# EAGLE board ISCTrainingProgramw2016_8 (EAGLE 7.5.0)
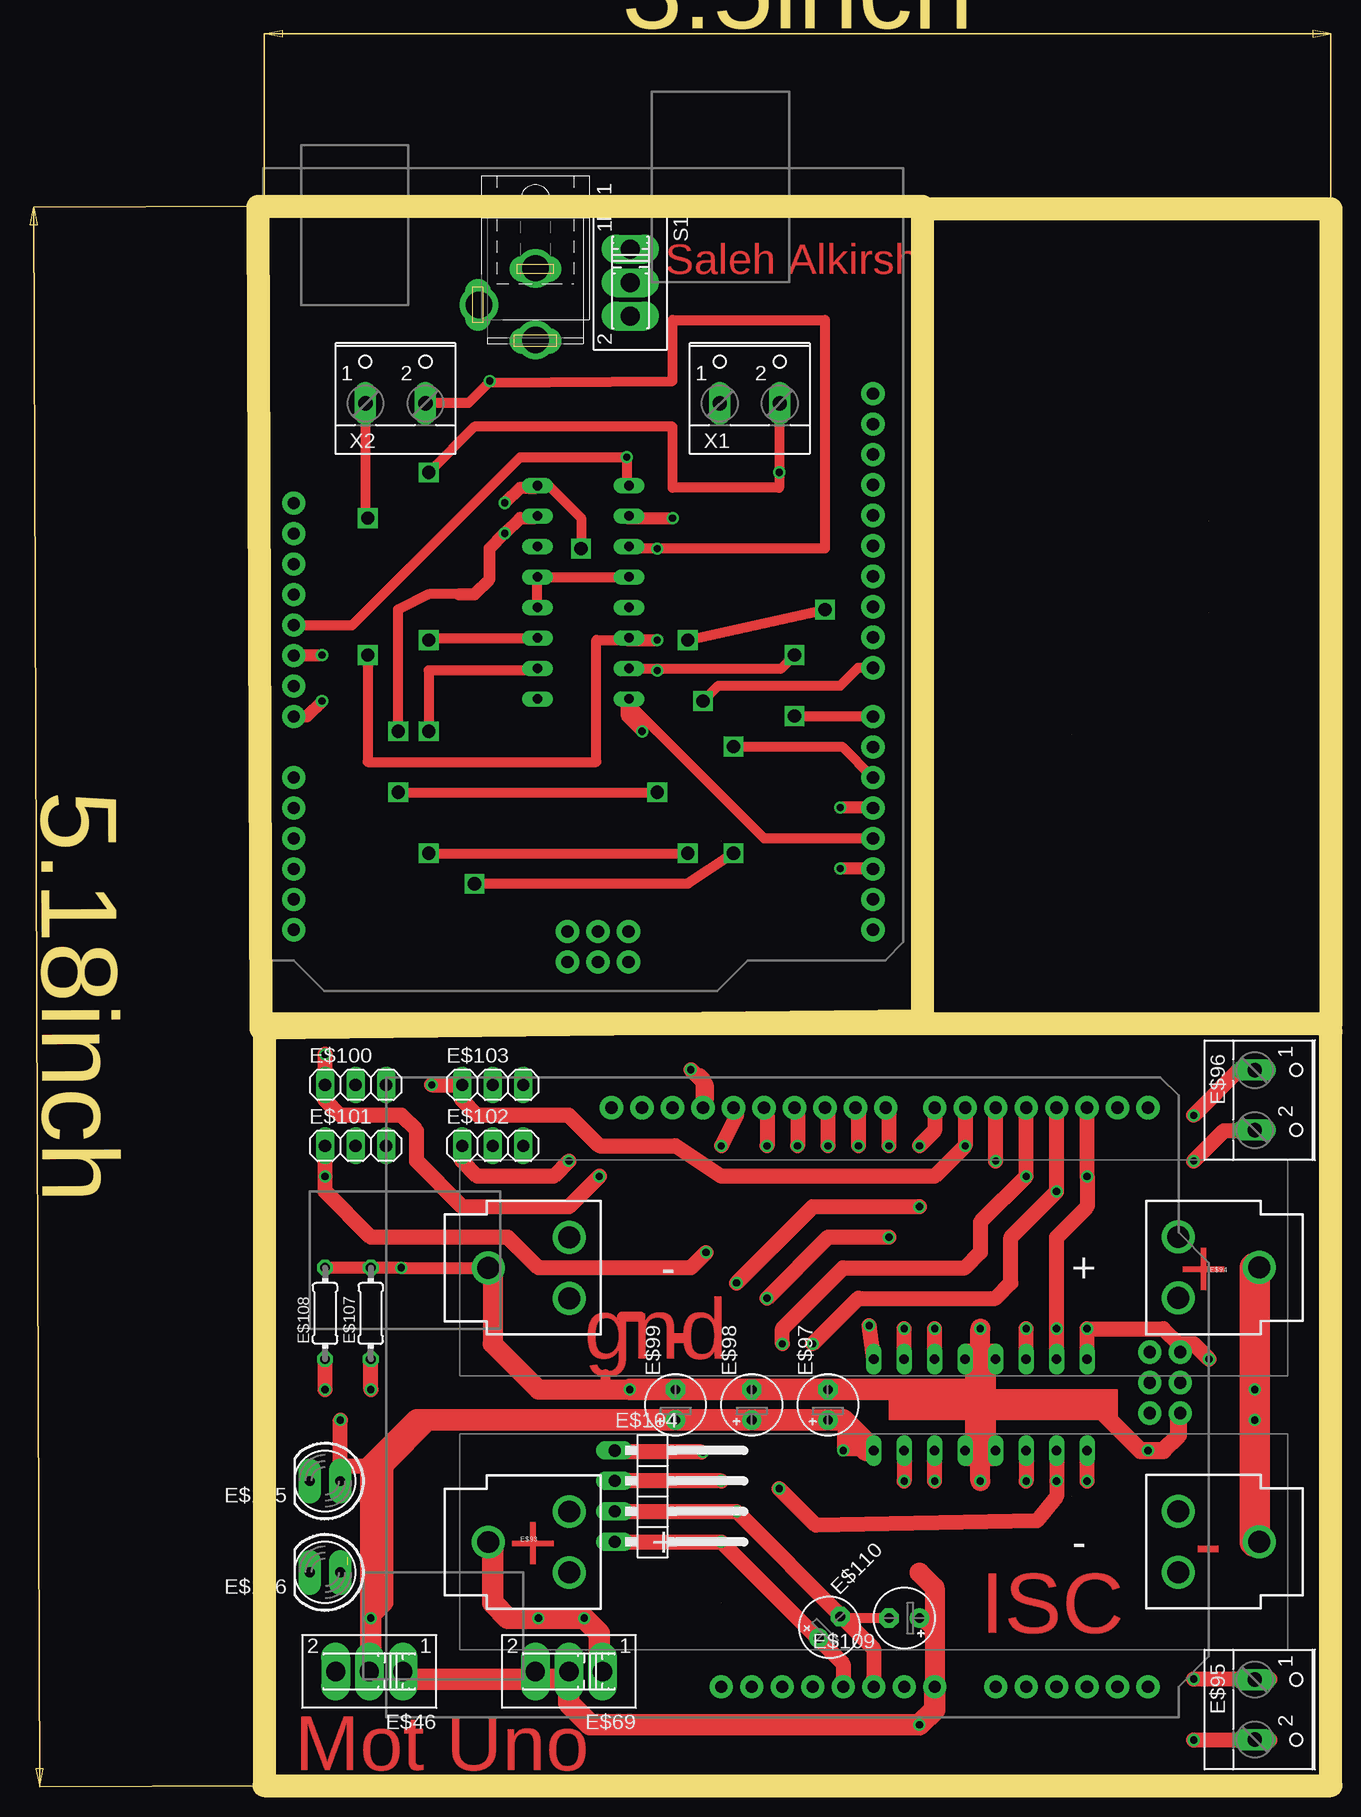
[diagram p0: board, top side]
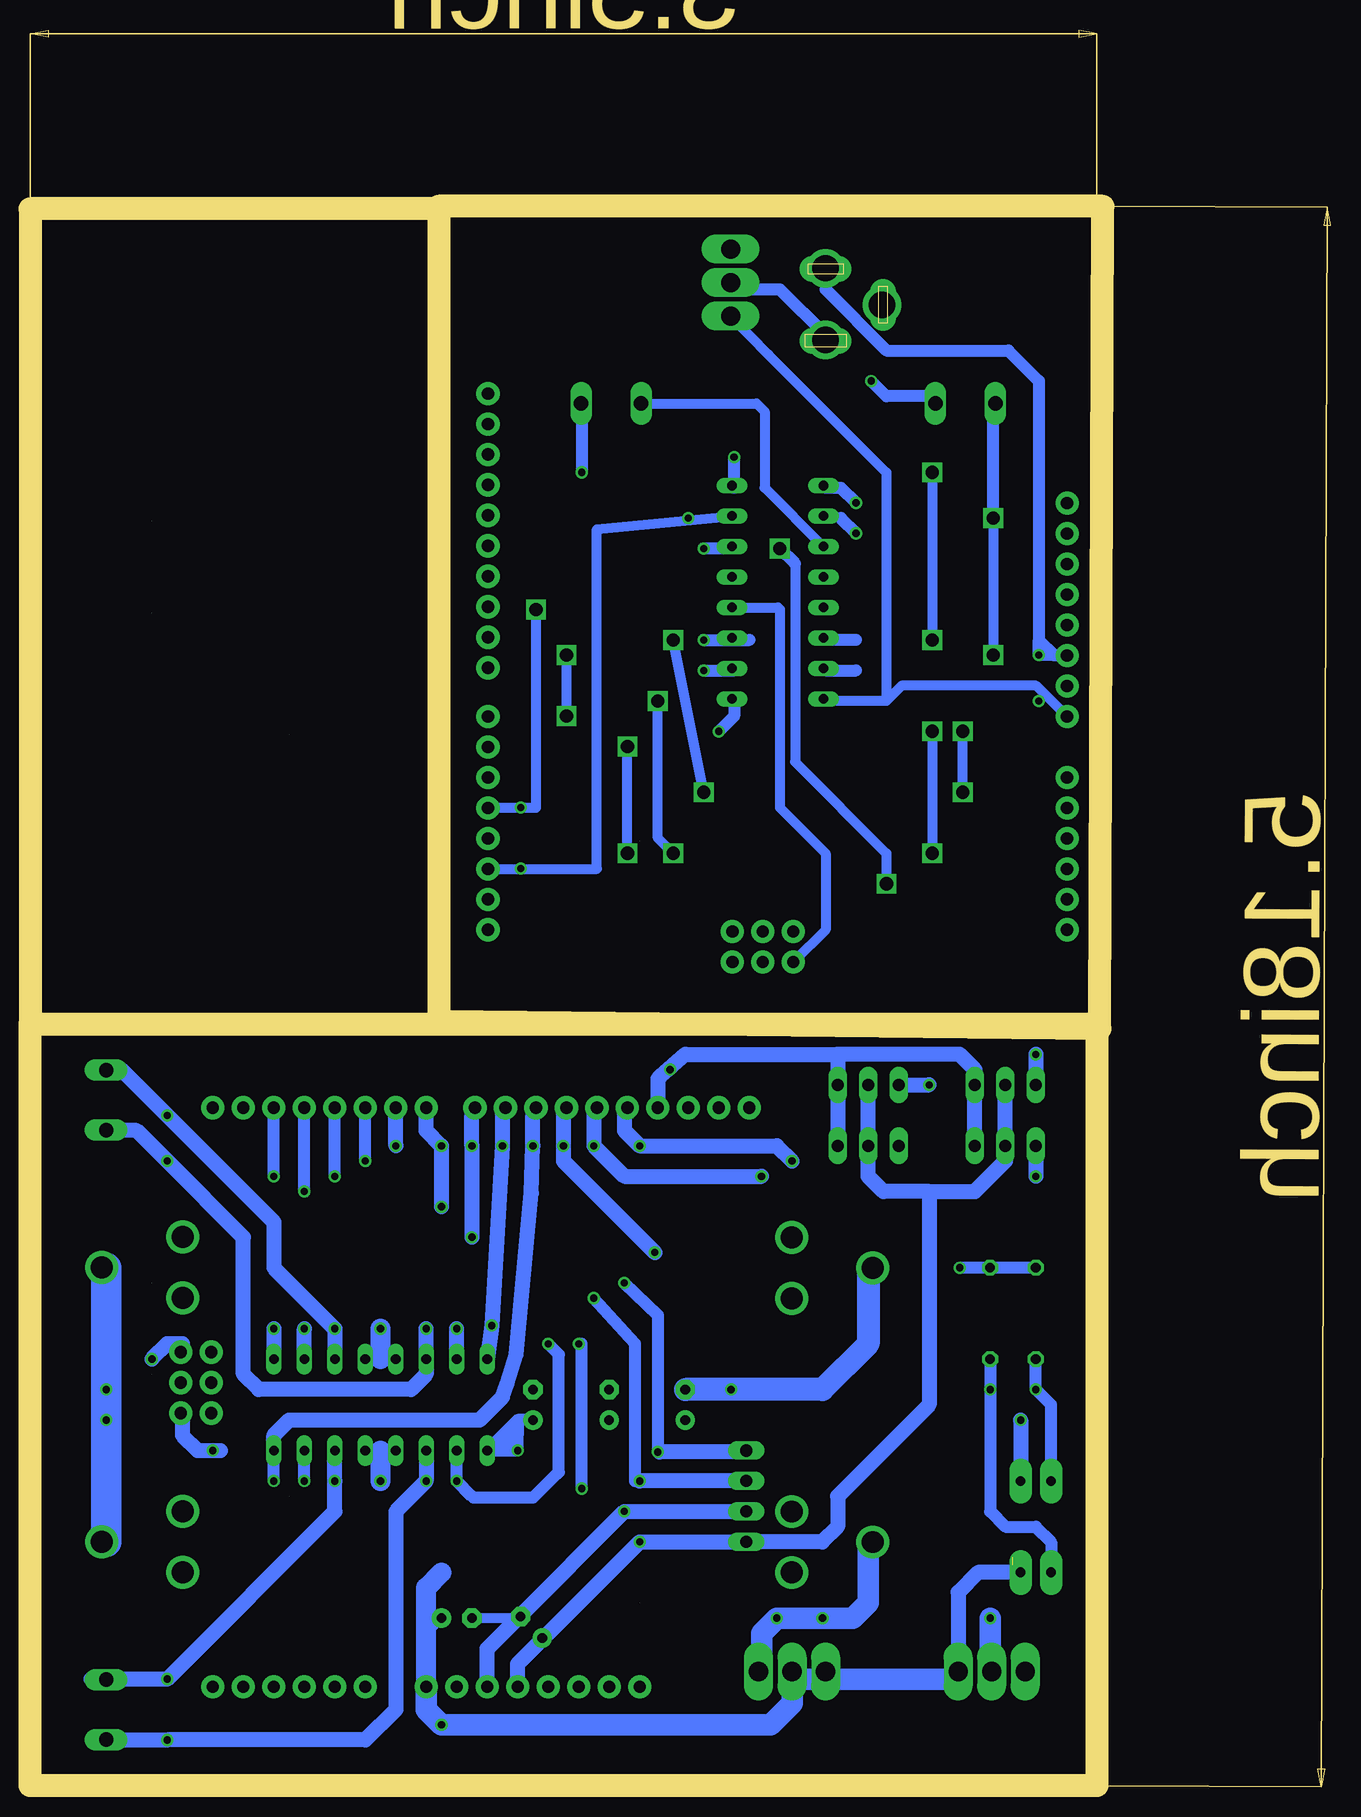
[diagram p1: board, bottom side, seen from below]

Size 89.41 x 131.66 mm. Coordinates in mm from the lower left corner, seen from the top.
Outline: 89.41,63.5 0.51,63.5 0.51,0 89.41,0 89.41,62.87 89.41,63.5
Outline: 55.12,131.44 89.41,131.44 89.41,63.5
Outline: 0.25,63.12 0,131.66 55.36,131.66 55.36,63.75 0.25,63.12
Copper layers (1*16): Top 0.035mm / dielectric 1.5mm / Bottom 0.035mm
Design rules "default": minimum track width 10mil, minimum drill 0.6mm, track to track 8mil, track to pad 8mil, pad to pad 8mil, via to via 8mil, smd to smd 8mil, copper to edge 40mil, drill to drill 8mil, minimum pad ring 10mil, minimum via ring 8mil, stop-mask expansion 4mil, vias tented up to drill 0mil, thermal gap 10mil

## Footprints (pad centres in the part's own frame; a part is rotated, then mirrored left to right if it is on the bottom)
5.5-2.5-BARRELCONNECTOR = drill 0.8 pad 2.184 long: 1 -3,0; 2 0,-4.8 | drill 1 pad 2.184 long: 3 3,0 | drill 2.2: P$1 -3.048,0; P$2 2.921,0; P$3 0,-4.699
ARDUINO_R3 = drill 1.016 pad 1.93: 3.3V 35.56,2.54; 5V 38.1,2.54; A0 50.8,2.54; A1 53.34,2.54; A2 55.88,2.54; A3 58.42,2.54; A4 60.96,2.54; A5 63.5,2.54; AREF 23.876,50.8; D0 63.5,50.8; D1 60.96,50.8; D2 58.42,50.8; D3 55.88,50.8; D4 53.34,50.8; D5 50.8,50.8; D6 48.26,50.8; D7 45.72,50.8; D8 41.656,50.8; D9 39.116,50.8; D10 36.576,50.8; D11 34.036,50.8; D12 31.496,50.8; D13 28.956,50.8; GND@1 40.64,2.54; GND@2 43.18,2.54; GND@3 26.416,50.8; GND@4 66.18,25.35; IOREF 30.48,2.54; MISO 63.64,30.43; MOSI 66.18,27.89; NC 27.94,2.54; RESET@1 33.02,2.54; RESET@2 63.64,25.35; SCK 63.64,27.89; SCL 18.796,50.8; SDA 21.336,50.8; VCC 66.18,30.43; VIN 45.72,2.54
SLIDE_SWITCH = drill 1.6 long: 1 -2.794,0; 2 0,0; 3 2.794,0
DIP16 = drill 0.8 long: P1 -8.89,-3.81; P2 -6.35,-3.81; P3 -3.81,-3.81; P4 -1.27,-3.81; P5 1.27,-3.81; P6 3.81,-3.81; P7 6.35,-3.81; P8 8.89,-3.81; P9 8.89,3.81; P10 6.35,3.81; P11 3.81,3.81; P12 1.27,3.81; P13 -1.27,3.81; P14 -3.81,3.81; P15 -6.35,3.81; P16 -8.89,3.81
BATTERY_18650-HOLDER = drill 1.829: GND@1 32.128,0.01; GND@2 25.38,2.55; GND@3 25.38,-2.53; PWR@1 -32.128,-0.01; PWR@2 -25.38,2.53; PWR@3 -25.38,-2.55
2PIN-SCREW-TERMINAL = drill 1.194 long: 1 -2.5,-1.27; 2 2.5,-1.27
E2,5-5 = drill 0.813 pad 1.6: + -1.27,0 | drill 0.813 pad 1.6 octagon: - 1.27,0
1X03 = drill 1.016 long: 1 -2.54,0; 2 0,0; 3 2.54,0
1X04/90 = drill 1.016 long: 1 -3.81,-3.81; 2 -1.27,-3.81; 3 1.27,-3.81; 4 3.81,-3.81
LED5MM = drill 0.813 pad 1.88 long: A -1.27,0; K 1.27,0
0204/7 = drill 0.813 octagon: 1 -3.81,0; 2 3.81,0

## Placement (x,y rotation side)
E$1  [5.5-2.5-BARRELCONNECTOR]  23.11,123.44 270 top
E$23  [ARDUINO_R3]  10.67,5.71 0 top
E$46  [SLIDE_SWITCH]  9.27,9.53 180 top
E$69  [SLIDE_SWITCH]  25.91,9.53 180 top
E$92  [DIP16]  60.2,31.75 0 bottom
E$93  [BATTERY_18650-HOLDER]  51.31,20.32 0 top
E$94  [BATTERY_18650-HOLDER]  51.31,43.18 180 top
E$95  [2PIN-SCREW-TERMINAL]  84.33,6.35 270 top
E$96  [2PIN-SCREW-TERMINAL]  84.33,57.15 270 top
E$97  [E2,5-5]  47.5,31.75 90 top
E$98  [E2,5-5]  41.15,31.75 90 top
E$99  [E2,5-5]  34.8,31.75 90 top
E$100  [1X03]  8.13,58.42 0 top
E$101  [1X03]  8.13,53.34 0 top
E$102  [1X03]  19.56,53.34 0 top
E$103  [1X03]  19.56,58.42 0 top
E$104  [1X04/90]  33.53,24.13 270 top
E$105  [LED5MM]  5.59,25.4 180 top
E$106  [LED5MM]  5.59,17.78 180 top
E$107  [0204/7]  9.4,39.37 90 top
E$108  [0204/7]  5.59,39.37 90 top
E$109  [E2,5-5]  53.85,13.97 180 top
E$110  [E2,5-5]  47.62,13.21 45 top
J1  ARDUINO_UNO_R3  [ARDUINO_R3]  0.44,134.84 270 top
S1  [SLIDE_SWITCH]  31.02,125.29 270 top
U$1  MOTOR_DRIVERDIP16  [DIP16]  27.09,99.48 270 top
X1  [2PIN-SCREW-TERMINAL]  40.98,116.49 0 top
X2  [2PIN-SCREW-TERMINAL]  11.45,116.49 0 top

## Library data of the parts
E$1 E$23 E$46 E$69 E$92-E$110 J1 S1 U$1 = ISCTRainingProgram
X1 X2 = ISCTRainingProgram; MPN: 237-102; OC_FARNELL: unknown; OC_NEWARK: 70K9898

## Nets
GND: U$1.P4 U$1.P5 U$1.P13
N$1: U$1.P3 X1.1
N$2: U$1.P6 X1.2
N$3: X2.2
N$4: U$1.P11 X2.1
N$5: J1.5V U$1.P16
N$6: J1.GND@4 U$1.P12
N$7: J1.VIN S1.3 U$1.P8
N$8: J1.D3 U$1.P9
N$9: J1.D2 U$1.P15
N$10: J1.D4
N$11: J1.D5 U$1.P1
N$12: J1.D7 U$1.P10
N$13: J1.D8 U$1.P7
S$60: E$92.P8 E$97.+
S$61: E$92.P6
S$209: E$92.P3
S$210: E$92.P11
S$211: E$92.P14
S$214: E$92.P9
S$215: E$92.P1
S$216: E$92.P2
S$217: E$92.P16
S$218: E$92.P15
S$219: E$92.P10
S$226: E$100.2 E$103.2 E$104.4
S$227: E$101.3 E$102.3
S$228: E$23.GND@3
S$229: E$103.1
S$231: E$101.1
S$232: E$100.1
S$233: E$102.1
S$234: E$99.-
S$239: E$104.3 E$109.-
S$245: E$108.2
S$246: E$108.1
S$247: E$106.K E$107.1
S$248: E$106.A
S$251: E$109.+
S$253: E$92.P7

## Tracks (layer width: path | path; a pad name or v marks a point on that pad's centre or on a via)
GND
  Top 0.813: U$1.P5 U$1.P4 U$1.P13
N$1
  Bottom 0.813: X1.1 28.86,115.22 28.19,114.55 28.19,108.2 U$1.P3
N$2  (via drill 0.6, 1.1)
  Top 0.813: v14.22,95.5 14.39,95.67 U$1.P6 | X1.2 43.43,115.17 v43.43,109.47 43.43,108.2 34.54,108.2 34.54,113.28 18.03,113.28 v14.22,109.47
  Bottom 0.813: v14.22,109.47 v14.22,95.5
  Bottom 1.016: 43.43,114.55 v43.43,109.47
N$4  (via drill 0.6, 1.1)
  Top 0.813: X2.1 8.95,105.85 v9.14,105.66 | v9.14,94.23 9.14,85.34 28.19,85.34 28.19,95.5 30.73,95.5 U$1.P11
  Top 1.016: 30.73,95.5 v33.27,95.5
  Bottom 0.813: v9.14,105.66 v9.14,94.23
  Bottom 1.016: v9.14,105.66 9.14,115.82 | v33.27,95.5 29.46,95.5
N$5  (via drill 0.6)
  Top 0.813: J1.5V 7.84,96.74 21.84,110.74 v30.73,110.74 30.73,108.54 U$1.P16
  Bottom 1.016: 30.73,108.2 v30.73,110.74
N$6
  Bottom 0.813: U$1.P12 27.09,98.21 26.92,98.04 26.92,81.53 23.11,77.72 23.11,71.34 J1.GND@4
N$7
  Bottom 0.813: 18.03,90.42 23.11,90.42 U$1.P8 | S1.3 27.87,119.31 18.03,109.47 18.03,90.42 | J1.VIN 5.55,91.69 16.76,91.69 18.03,90.42
N$8
  Top 0.813: U$1.P9 30.9,90.25 42.16,78.99 51.21,78.99 J1.D3
N$9
  Bottom 0.813: J1.D2 42.19,76.42 42.16,76.45 42.16,104.73 U$1.P15
N$10  (via drill 0.6, 1.1)
  Top 0.813: 16.76,99.31 14.22,99.31 11.68,98.04 v11.68,87.88 | v11.68,82.8 v33.27,82.8 | v35.81,95.5 v47.24,98.04
  Top 1.016: 16.76,99.31 18.03,99.31 19.3,100.58 19.3,103.12 v20.57,104.39 21.84,105.66 23.11,105.66
  Bottom 0.813: v33.27,82.8 v35.81,95.5 | v47.24,98.04 47.24,81.53 47.27,81.5 J1.D4 | v11.68,82.8 v11.68,87.88
  Bottom 1.016: 21.84,105.66 v20.57,104.39
N$11  (via drill 1.1)
  Top 0.813: U$1.P1 24.21,108.37 26.92,105.66 v26.92,103.12 | v18.03,75.18 35.81,75.18 v39.62,77.72 | v39.62,86.61 48.67,86.61 J1.D5
  Bottom 0.813: 25.65,101.85 25.65,85.34 18.03,77.72 v18.03,75.18 | v39.62,77.72 v39.62,86.61
  Bottom 1.016: 25.65,101.85 v26.92,103.12
N$12  (via drill 1.1)
  Top 0.813: U$1.P10 43.6,93.13 v44.7,94.23 | v44.7,89.15 51.21,89.15 J1.D7
  Bottom 0.813: v44.7,94.23 v44.7,89.15
N$13  (via drill 1.1)
  Top 0.813: U$1.P7 23.11,92.96 14.22,92.96 v14.22,87.88 | v14.22,77.72 v35.81,77.72 | v37.08,90.42 38.35,91.69 48.51,91.69 50.01,93.19 J1.D8
  Bottom 0.813: v14.22,87.88 v14.22,77.72 | v35.81,77.72 37.08,78.99 v37.08,90.42
S$2  (via drill 0.6)
  Top 0.813: 14.16,115.27 17.54,115.27 19.24,116.97 34.54,117.09 34.54,122.17 47.24,122.17 47.24,103.12 v33.27,103.12 30.73,103.12
  Bottom 1.016: 30.73,103.12 v33.27,103.12
S$4
  Bottom 1.016: 23.11,120.9 26.92,124.71 29.46,124.71
S$12  (via drill 0.6)
  Top 1.016: 2.79,94.23 v5.33,94.23
  Bottom 1.016: 23.11,127.25 23.11,124.71 18.03,119.63 7.87,119.63 5.33,117.09 5.33,95.5 | 5.33,95.5 4.06,94.23 | 4.06,94.23 2.79,94.23 | 4.06,94.23 v5.33,94.23 5.33,95.5
S$13  (via drill 0.6)
  Top 1.016: 2.79,89.15 4.06,89.15 v5.33,90.42
S$14  (via drill 0.6)
  Top 1.016: 51.05,81.53 v48.51,81.53
S$15  (via drill 0.6)
  Top 1.016: 51.05,76.45 v48.51,76.45
S$16  (via drill 0.6)
  Bottom 1.016: 14.22,115.82 18.03,115.82 v19.3,117.09
S$17
  Bottom 1.016: 23.11,92.96 20.57,92.96
S$18
  Bottom 1.016: 20.57,95.5 23.11,95.5
S$19  (via drill 0.6)
  Top 1.016: v20.57,106.93 21.84,108.2 23.11,108.2
  Bottom 1.016: 23.11,108.2 21.84,108.2 v20.57,106.93
S$20  (via drill 0.6)
  Top 1.016: 30.73,105.66 v34.54,105.66
S$21  (via drill 0.6)
  Top 1.016: v32,87.88 30.73,89.15 30.73,90.42
  Bottom 1.016: 30.73,90.42 30.73,89.15 v32,87.88
S$22  (via drill 0.6)
  Bottom 1.016: v33.27,92.96 30.73,92.96
S$34  (1 unrouted)
S$60  (via drill 0.6)
  Top 1.016: 48.77,29.21 v48.77,27.94 50.04,27.94 48.77,29.21 | 48.77,30.48 48.77,29.21
  Top 1.27: 9.4,26.67 6.86,26.67 v6.86,30.48 | v9.4,13.97 10.67,15.24 10.67,26.67 14.48,30.48
  Top 1.778: 9.4,10.16 v9.4,13.97 9.4,26.67 13.21,30.48 14.48,30.48 E$97.+ 48.77,30.48 50.67,28.57 50.67,27.94
  Bottom 1.016: E$97.+ 48.77,30.48 | 48.77,30.48 E$92.P8 50.04,27.94 | 50.04,27.94 v48.77,27.94 48.77,29.21 | 48.77,30.48 48.77,29.21 | 48.77,29.21 50.04,27.94
  Bottom 1.27: v6.86,30.48 6.86,26.67
  Bottom 1.778: 9.4,10.16 v9.4,13.97
S$61  (via drill 0.6)
  Top 1.27: v56.39,25.4 E$92.P6 | v77.98,3.81 84.33,3.81
  Bottom 1.27: 83.06,3.81 v77.98,3.81 61.47,3.81 58.93,6.35 58.93,22.86 v56.39,25.4 E$92.P6
S$209  (via drill 0.6)
  Top 1.27: 84.33,8.89 v77.98,8.89 | E$92.P3 v64.01,25.4
  Bottom 1.27: 84.33,8.89 v77.98,8.89 64.01,22.86 v64.01,25.4 E$92.P3
S$210  (via drill 0.6)
  Top 1.27: E$92.P11 v56.39,38.1 | v77.98,52.07 80.52,54.61 83.06,54.61
  Bottom 1.27: 83.06,54.61 80.52,54.61 v77.98,52.07 71.63,45.72 71.63,34.29 70.36,33.02 57.66,33.02 56.39,34.29 E$92.P11 v56.39,38.1
S$211  (via drill 0.6)
  Top 1.27: E$92.P14 v64.01,38.1 | v77.98,55.88 81.79,59.69 83.06,59.69
  Bottom 1.27: 83.06,59.69 81.79,59.69 v77.98,55.88 69.09,46.99 69.09,43.18 v64.01,38.1 E$92.P14
S$212  (via drill 0.6)
  Top 1.27: 70.36,31.75 70.36,31.11
  Top 1.422: 70.36,31.11 73.53,27.94 v74.17,27.94 75.44,27.94 76.71,29.21 76.71,31.11
S$213
  Bottom 1.27: 76.71,30.48 76.71,29.21 75.44,27.94 73.53,27.94
S$214  (via drill 0.6)
  Top 1.27: E$92.P9 v50.93,38.35 | 50.04,55.88 v50.04,53.34
  Bottom 1.27: 50.04,55.88 v50.04,53.34 v50.93,38.35 E$92.P9
S$215  (via drill 0.6)
  Top 1.27: 47.5,55.88 v47.5,53.34 | v69.09,25.4 E$92.P1
  Bottom 1.016: v69.09,25.4 E$92.P1
  Bottom 1.27: E$92.P1 69.09,29.21 67.82,30.48 51.94,30.48 50.04,32.38 49.66,33.53 48.9,35.94 47.62,49.4 v47.5,53.34 47.5,55.88
S$216  (via drill 0.6)
  Top 1.27: E$92.P2 66.55,24.13 64.9,22.1 46.48,21.72 43.43,24.77
  Bottom 1.016: v66.55,25.4 E$92.P2
S$217  (via drill 0.6)
  Top 1.27: v79.25,35.56 77.98,36.83 76.71,36.83 75.44,38.1 v69.09,38.1 E$92.P16
  Bottom 1.27: 76.71,36.83 77.98,36.83 v79.25,35.56 | v69.09,38.1 E$92.P16
S$218  (via drill 0.6)
  Top 1.27: E$92.P15 66.55,45.72 69.09,48.26 v69.09,50.8 69.09,55.88
  Bottom 1.016: v69.09,50.8 69.09,55.88
  Bottom 1.27: E$92.P15 v66.55,38.1
S$219  (via drill 0.6)
  Top 1.27: E$92.P10 v53.85,38.1
  Bottom 1.27: E$92.P10 v53.85,38.1
S$220
  Bottom 1.016: 43.43,24.77 43.43,35.05
S$221  (via drill 0.6)
  Top 1.27: v46.23,36.83 50.04,40.64 61.47,40.64 62.74,41.91 62.74,45.72 v66.55,49.53 66.55,55.88
  Bottom 1.016: v46.23,36.83 45.34,35.94 45.34,26.16 | v66.55,49.53 66.55,55.88
S$222  (via drill 0.6)
  other vias: 43.43,24.77
S$223  (via drill 0.6)
  Top 1.27: v43.69,36.83 43.69,38.1 48.77,43.18 58.93,43.18 60.2,44.45 60.2,46.99 v64.01,50.8 64.01,55.88
  Bottom 1.016: v64.01,50.8 64.01,55.88
S$224  (via drill 0.6)
  Top 1.27: v61.47,52.07 61.47,55.88
  Bottom 1.016: v61.47,52.07 61.47,55.88
S$225
  Bottom 1.016: 43.43,35.18 43.43,36.83
S$226  (via drill 0.6)
  Top 1.27: E$104.4 v38.61,20.32 48.77,10.16 48.77,8.89
  Bottom 1.27: 14.48,49.53 10.67,49.53 8.13,52.07 E$100.2 | 14.48,49.53 14.48,31.75 22.1,24.13 22.1,21.59 23.37,20.32 E$104.4 v38.61,20.32 48.77,10.16 48.77,8.89 | 14.48,49.53 18.29,49.53 19.56,50.8 E$103.2
S$227
  Bottom 1.27: E$101.3 10.67,59.69 11.94,60.96 22.1,60.96 | 22.1,60.96 34.8,60.96 36.83,59.18 37.08,58.93 37.08,56.39 | 22.1,60.96 E$102.3
S$228
  Top 1.27: 36.83,59.18 37.08,58.93 E$23.GND@3
S$229  (via drill 0.6)
  Top 1.27: v58.93,53.34 56.39,50.8 38.61,50.8 34.8,53.34 28.45,53.34 25.91,55.88 18.29,55.88 17.02,57.15 E$103.1 v14.48,58.42
  Bottom 1.27: v58.93,53.34 58.93,55.88 | E$103.1 v14.48,58.42
S$230
  Top 1.27: 58.93,55.88 58.93,53.34
S$231  (via drill 0.6)
  Top 1.27: v37.34,44.45 36.07,43.18 23.37,43.18 20.83,45.72 9.4,45.72 5.59,49.53 v5.59,50.8 E$101.1 | 44.96,55.88 v44.96,53.34
  Bottom 1.27: 44.96,55.88 v44.96,53.34 44.96,52.07 v37.34,44.45 | E$101.1 v5.59,50.8
S$232  (via drill 0.6)
  Top 1.27: v28.45,50.8 25.91,48.26 17.02,48.26 13.21,52.07 13.21,54.61 11.94,55.88 6.86,55.88 5.59,57.15 v5.59,60.96 | 42.42,55.88 v42.42,53.34
  Bottom 1.27: 42.42,55.88 v42.42,53.34 39.88,50.8 v28.45,50.8 | v5.59,60.96 E$100.1
S$233  (via drill 0.6)
  Top 1.27: v25.91,52.07 24.64,50.8 18.29,50.8 17.02,52.07 E$102.1 | 39.88,55.88 v38.61,53.34
  Bottom 1.27: 39.88,55.88 39.88,54.61 v38.61,53.34 27.18,53.34 v25.91,52.07
S$234
  Bottom 1.93: 19.56,43.18 19.56,36.83 23.37,33.02 E$99.-
S$235  (via drill 0.6)
  Top 1.27: 56.39,55.88 56.39,54.61 v55.12,53.34 | v55.12,48.26 46.23,48.26 v39.88,41.91
  Bottom 1.016: v39.88,41.91 37.08,39.24 v37.08,27.81
  Bottom 1.27: 56.39,55.88 56.39,54.61 v55.12,53.34 v55.12,48.26
S$236  (via drill 0.6)
  Top 1.27: 52.58,55.88 v52.58,53.34 | v52.58,45.72 47.5,45.72 v42.42,40.64
  Bottom 1.016: 38.99,25.4 38.99,36.83 v42.42,40.64
  Bottom 1.27: 52.58,55.88 v52.58,53.34 v52.58,45.72
S$237  (via drill 0.6)
  Top 1.676: v60.2,25.4 60.2,27.94
  Bottom 1.676: v60.2,25.4 60.2,27.94
S$238  (via drill 0.6)
  Top 1.676: 60.2,35.56 v60.2,38.1
  Bottom 1.676: 60.2,35.56 v60.2,38.1
S$239  (via drill 0.6)
  Top 0.813: E$109.- 48.77,13.97
  Top 1.27: E$104.3 v39.88,22.86 48.77,13.97 51.31,11.43 51.31,8.89
  Bottom 0.813: 48.77,13.97 E$109.-
  Bottom 1.27: 51.31,8.89 51.31,11.43 48.77,13.97 v39.88,22.86 E$104.3
S$240  (via drill 0.6)
  Top 1.27: v38.61,25.4 29.97,25.4
  Bottom 1.27: 29.97,25.4 v38.61,25.4
S$241
  Top 1.27: 36.96,27.81 29.72,27.81
S$242
  Bottom 1.27: 29.72,27.81 36.96,27.81
S$243  (via drill 0.6)
  Top 2.54: 83.06,20.32 v83.06,30.48 v83.06,33.02 83.06,43.18
  Bottom 2.54: 83.06,43.18 v83.06,33.02 v83.06,30.48 83.06,20.32
S$244  (via drill 0.6)
  Top 1.778: 19.56,20.32 19.56,15.24 20.83,13.97 v23.37,13.97 v27.18,13.97 28.45,12.7 28.45,8.89
  Bottom 1.778: 28.45,8.89 28.45,12.7 v27.18,13.97 v23.37,13.97 20.83,13.97 19.56,15.24 19.56,20.32
S$245  (via drill 0.6)
  Top 0.813: 28.96,34.29 28.96,33.02
  Top 1.016: E$108.2 v11.94,43.18 19.56,43.18
  Top 1.676: 19.56,43.18 19.56,36.83 23.37,33.02 28.96,33.02 v30.99,33.02
  Top 1.778: v30.99,33.02 58.93,33.02
  Bottom 1.016: E$108.2 v11.94,43.18
S$246  (via drill 0.6)
  Top 1.27: v5.59,33.02 E$108.1
  Bottom 1.016: 4.32,26.67 4.32,31.75 v5.59,33.02 E$108.1
S$247  (via drill 0.6)
  Top 1.27: v9.4,33.02 E$107.1
  Bottom 1.016: E$107.1 v9.4,33.02 9.4,22.86 8.13,21.59 5.59,21.59 4.32,20.32 E$106.K
S$248
  Bottom 1.27: E$106.A 10.41,17.78 12.07,16.13 12.07,9.27
S$249
  Top 0.813: 30.35,39.12 31.88,39.12
S$250
  Top 0.813: 34.54,37.34 35.56,37.34
S$251  (via drill 0.6)
  Top 1.016: 56.39,12.7 E$109.+
  Top 1.676: 55.12,17.78 56.39,16.51 56.39,12.7 56.39,7.62
  Top 1.778: 25.91,8.89 11.94,8.89 | 56.39,7.62 56.39,6.35 v55.12,5.08 27.69,5.08 25.91,6.86 25.91,7.62
  Bottom 0.813: 56.39,8.89 56.39,12.7 E$109.+
  Bottom 1.676: 56.39,8.89 56.39,16.51 55.12,17.78
  Bottom 1.778: 56.39,7.62 56.39,6.35 v55.12,5.08 27.69,5.08 25.91,6.86 25.91,8.89 11.94,8.89
S$252
  Bottom 1.016: 45.47,26.04 47.5,24 52.45,24
S$253  (via drill 0.6)
  Top 1.27: E$92.P7 v53.85,25.4
  Bottom 1.016: E$92.P7 v53.85,25.4 52.58,24.13
S$254  (via drill 0.6)
  Top 1.27: v36.07,59.69 37.34,58.42 37.34,57.15
S$276  (1 unrouted)
S$279  (1 unrouted)
S$311  (1 unrouted)
S$312  (1 unrouted)
S$328  (1 unrouted)
S$331  (1 unrouted)
S$361  (1 unrouted)
S$362  (1 unrouted)
S$377  (1 unrouted)
S$380  (1 unrouted)
S$410  (1 unrouted)
S$411  (1 unrouted)
S$427  (1 unrouted)
S$430  (1 unrouted)
S$461  (1 unrouted)
S$462  (1 unrouted)
(copper drawn outside any net)
  shapes: Top area x2

## Text on the board
Top: Saleh Alkirsh | + | gnd | + | - | ISC | Mot Uno